# EAGLE board extruder-controller (EAGLE 5.06)
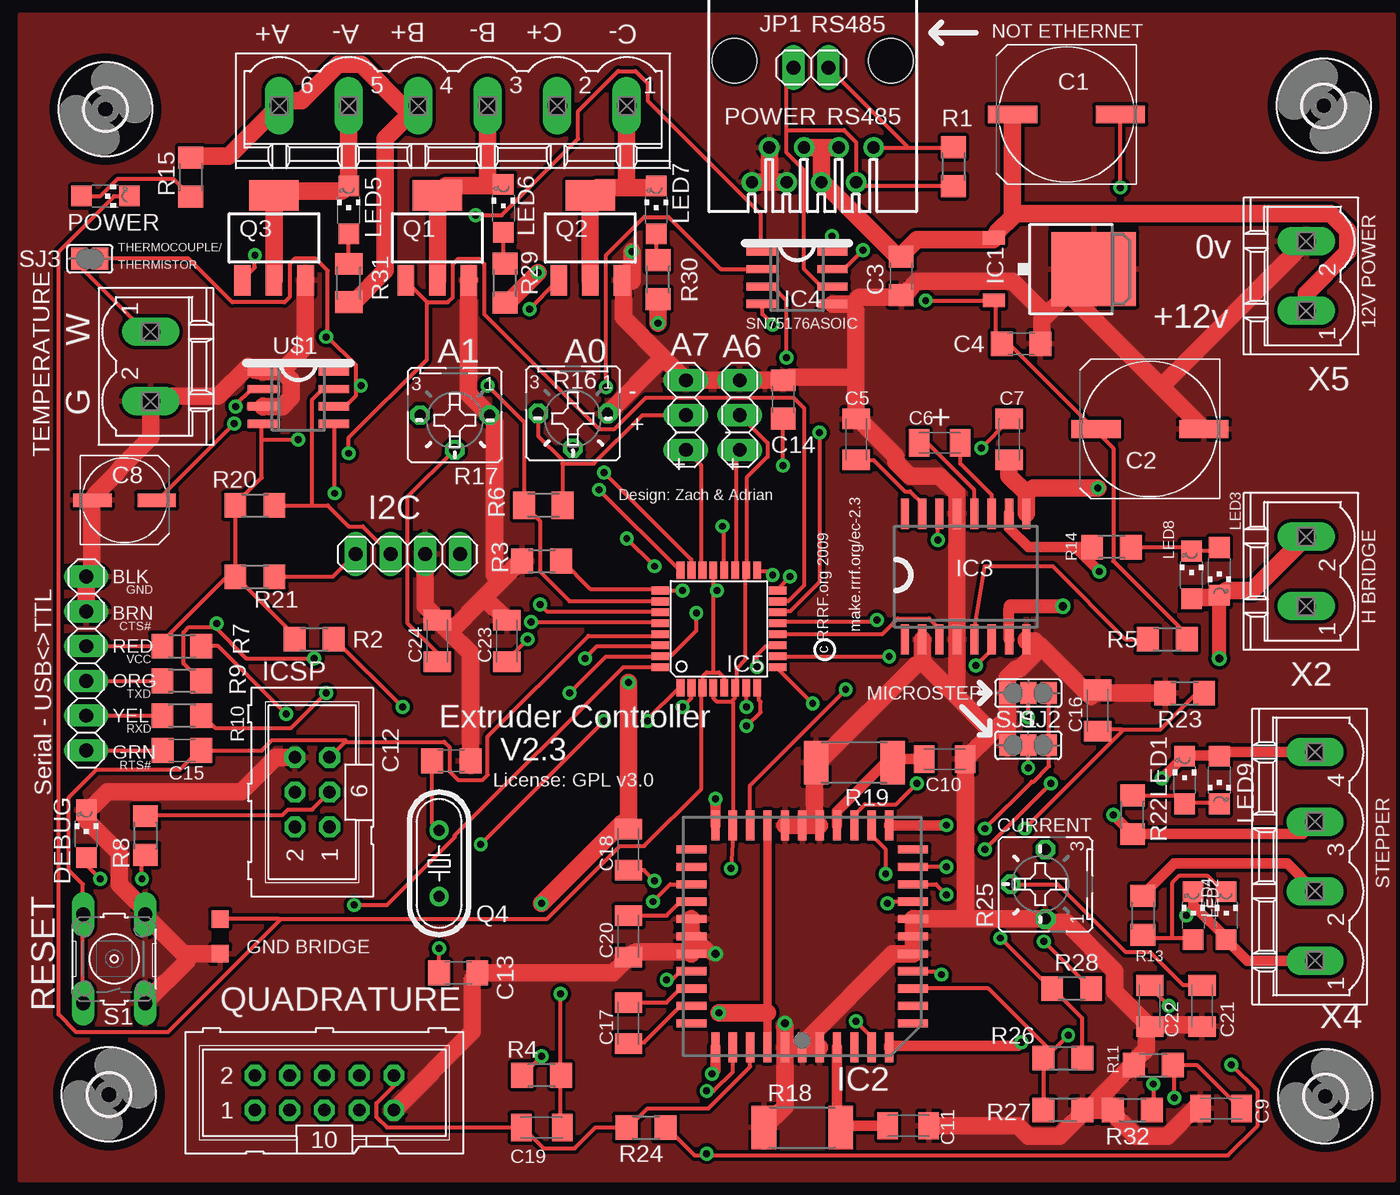
[diagram p0: board, top side]
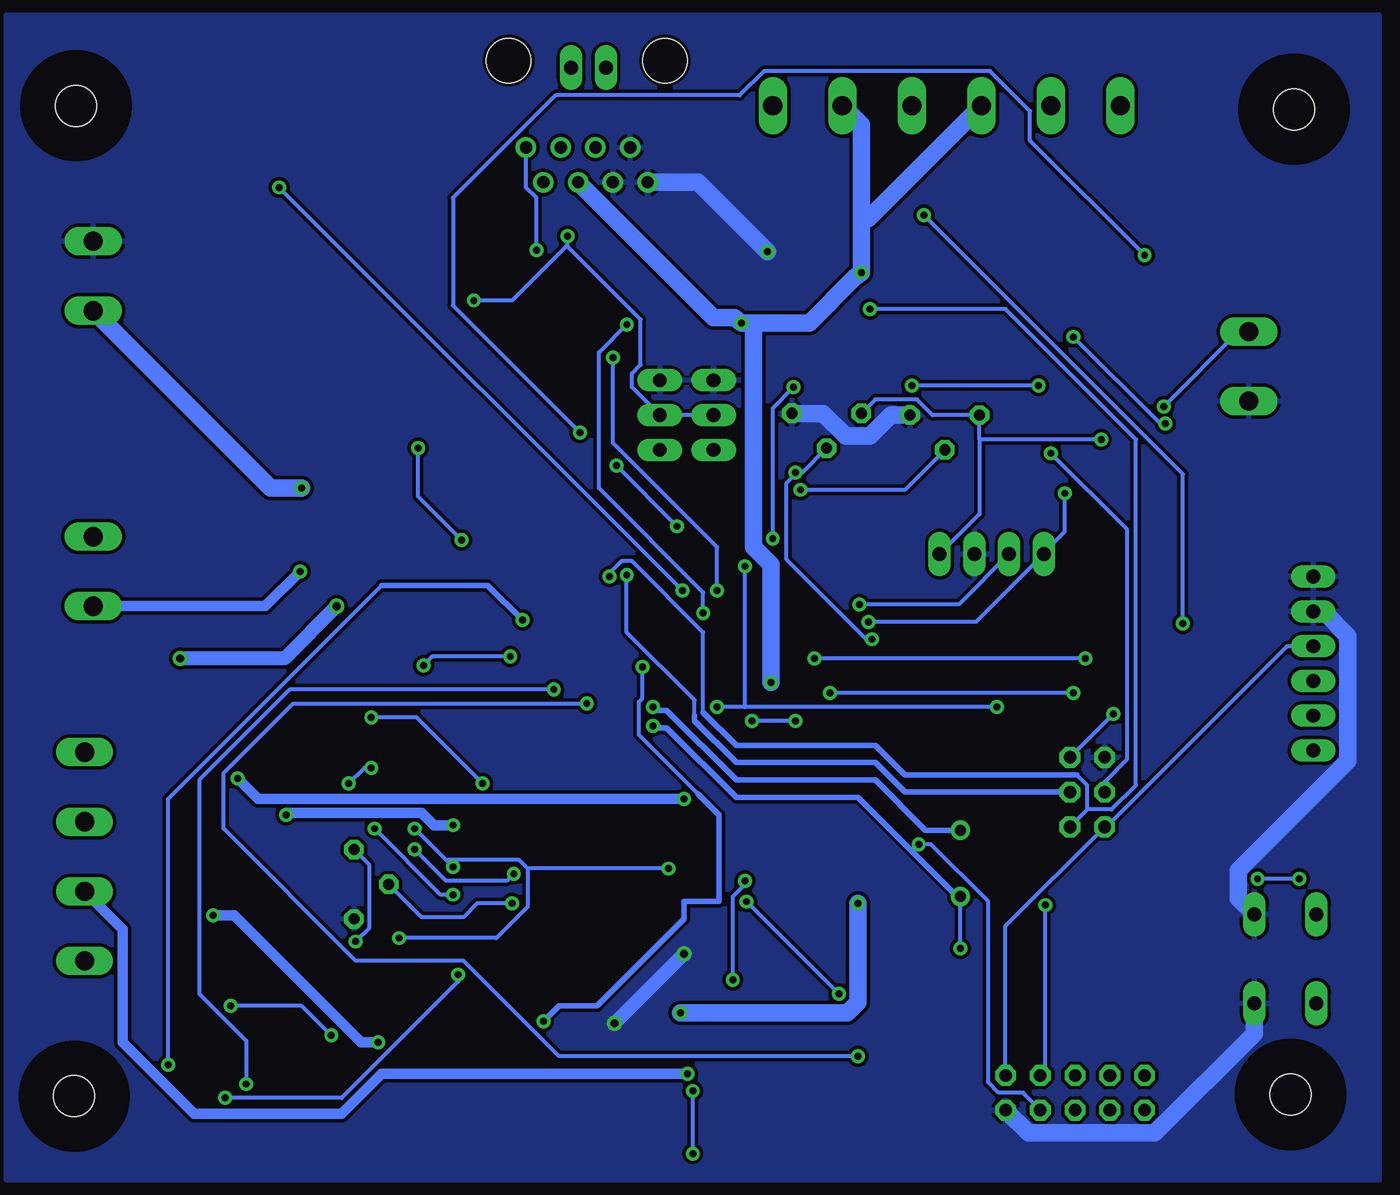
[diagram p1: board, bottom side, seen from below]

No outline drawn. Coordinates in mm, seen from the top.
Copper layers (1*16): Top 0.035mm / dielectric 1.5mm / Bottom 0.035mm
Design rules "reprap": minimum track width 8mil, minimum drill 20mil, track to track 10mil, track to pad 10mil, pad to pad 10mil, via to via 10mil, smd to smd 8mil, copper to edge 10mil, drill to drill 8mil, minimum pad ring 12mil, minimum via ring 10mil, stop-mask expansion 4mil, vias tented up to drill 25mil, thermal gap 10mil
Net classes: 0 default: width 0.305 mm; 1 power: width 1.27 mm; 2 motors: width 0.762 mm

## Footprints (pad centres in the part's own frame; a part is rotated, then mirrored left to right if it is on the bottom)
UD-10X10_NICHICON = smd 3.6 x 1.3: + 3.925,0; - -3.95,0
C1206 = smd 1.6 x 1.8: 1 -1.4,0; 2 1.4,0
C1206K = smd 1.5 x 2: 1 -1.5,0; 2 1.5,0
UD-6,3X5,8_NICHICON = smd 2.8 x 1: + 2.35,0; - -2.35,0
CHIPLED_1206 = smd 1.5 x 1.5: A 0,-1.75; C 0,1.75
3,0 = hole 3: 0,0
TO252 = smd 1 x 1.6: 1 -2.28,-4.8; 2 2.28,-4.8 | smd 5.4 x 6.2: 3 0,2.5
PLCC44 = smd 0.6 x 2.2: 1 0,8.1; 2 -1.27,8.1; 3 -2.54,8.1; 4 -3.81,8.1; 5 -5.08,8.1; 6 -6.35,8.1; 18 -6.35,-8.1; 19 -5.08,-8.1; 20 -3.81,-8.1; 21 -2.54,-8.1; 22 -1.27,-8.1; 23 0,-8.1; 24 1.27,-8.1; 25 2.54,-8.1; 26 3.81,-8.1; 27 5.08,-8.1; 28 6.35,-8.1; 40 6.35,8.1; 41 5.08,8.1; 42 3.81,8.1; 43 2.54,8.1; 44 1.27,8.1 | smd 2.2 x 0.6: 7 -8.1,6.35; 8 -8.1,5.08; 9 -8.1,3.81; 10 -8.1,2.54; 11 -8.1,1.27; 12 -8.1,0; 13 -8.1,-1.27; 14 -8.1,-2.54; 15 -8.1,-3.81; 16 -8.1,-5.08; 17 -8.1,-6.35; 29 8.1,-6.35; 30 8.1,-5.08; 31 8.1,-3.81; 32 8.1,-2.54; 33 8.1,-1.27; 34 8.1,0; 35 8.1,1.27; 36 8.1,2.54; 37 8.1,3.81; 38 8.1,5.08; 39 8.1,6.35
SO16W = smd 0.6 x 2.2: 1 -4.445,-4.6; 2 -3.175,-4.6; 3 -1.905,-4.6; 4 -0.635,-4.6; 5 0.635,-4.6; 6 1.905,-4.6; 7 3.175,-4.6; 8 4.445,-4.6; 9 4.445,4.6; 10 3.175,4.6; 11 1.905,4.6; 12 0.635,4.6; 13 -0.635,4.6; 14 -1.905,4.6; 15 -3.175,4.6; 16 -4.445,4.6
SO08 = smd 0.6 x 2.2: 1 -1.905,-2.6; 2 -0.635,-2.6; 3 0.635,-2.6; 4 1.905,-2.6; 5 1.905,2.6; 6 0.635,2.6; 7 -0.635,2.6; 8 -1.905,2.6
TQFP32-08 = smd 1.27 x 0.559: 1 -4.293,2.8; 2 -4.293,2; 3 -4.293,1.2; 4 -4.293,0.4; 5 -4.293,-0.4; 6 -4.293,-1.2; 7 -4.293,-2; 8 -4.293,-2.8; 17 4.293,-2.8; 18 4.293,-2; 19 4.293,-1.2; 20 4.293,-0.4; 21 4.293,0.4; 22 4.293,1.2; 23 4.293,2; 24 4.293,2.8 | smd 0.559 x 1.27: 9 -2.8,-4.293; 10 -2,-4.293; 11 -1.2,-4.293; 12 -0.4,-4.293; 13 0.4,-4.293; 14 1.2,-4.293; 15 2,-4.293; 16 2.8,-4.293; 25 2.8,4.293; 26 2,4.293; 27 1.2,4.293; 28 0.4,4.293; 29 -0.4,4.293; 30 -1.2,4.293; 31 -2,4.293; 32 -2.8,4.293
520426-4 = drill 0.889 round: 1 -4.445,6.35; 2 -3.175,8.89; 3 -1.905,6.35; 4 -0.635,8.89; 5 0.635,6.35; 6 1.905,8.89; 7 3.175,6.35; 8 4.445,8.89 | hole 3.251: -5.715,0; 5.715,0
1X02 = drill 1.016 long: 1 -1.27,0; 2 1.27,0
1X04 = drill 1.016 long: 1 -3.81,0; 2 -1.27,0; 3 1.27,0; 4 3.81,0
1X06 = drill 1.016 long: 1 -6.35,0; 2 -3.81,0; 3 -1.27,0; 4 1.27,0; 5 3.81,0; 6 6.35,0
1X03 = drill 1.016 long: 1 -2.54,0; 2 0,0; 3 2.54,0
SOT223 = smd 1.219 x 2.235: 1 -2.311,-3.099; 2 0,-3.099; 3 2.311,-3.099 | smd 3.6 x 2.2: 4 0,3.099
HC49/S = drill 0.813 round: 1 -2.413,0; 2 2.413,0
R1206 = smd 1.6 x 1.803: 1 -1.422,0; 2 1.422,0
M1206 = smd 1.6 x 2: 1 -1.4,0; 2 1.4,0
B25P = drill 0.813 octagon: A -2.54,0; E 2.54,0; S 0,2.54
R2512 = smd 1.8 x 3.2: 1 -2.8,0; 2 2.8,0
B3F-10XX = drill 1.016 long: 1 -3.251,2.261; 2 3.251,2.261; 3 -3.251,-2.261; 4 3.251,-2.261
SJ_2 = smd 1.168 x 1.6: 1 -1.524,0; 2 0,0; 3 1.524,0
SJ = smd 1.168 x 1.6: 1 -0.762,0; 2 0.762,0
ML6 = drill 0.914 octagon: 1 -2.54,-1.27; 2 -2.54,1.27; 3 0,-1.27; 4 0,1.27; 5 2.54,-1.27; 6 2.54,1.27
ML10 = drill 0.914 octagon: 1 -5.08,-1.27; 2 -5.08,1.27; 3 -2.54,-1.27; 4 -2.54,1.27; 5 0,-1.27; 6 0,1.27; 7 2.54,-1.27; 8 2.54,1.27; 9 5.08,-1.27; 10 5.08,1.27
MSTBV6 = drill 1.397 long: 1 -12.7,0; 2 -7.62,0; 3 -2.54,0; 4 2.54,0; 5 7.62,0; 6 12.7,0
MSTBV2 = drill 1.397 long: 1 -2.54,0; 2 2.54,0
MSTBV4 = drill 1.397 long: 1 -7.62,0; 2 -2.54,0; 3 2.54,0; 4 7.62,0
GND-GNDA = smd 1.27 x 1.27: GND -1.27,0; GNDA 1.27,0

## Placement (x,y rotation side)
C1  100uF  [UD-10X10_NICHICON]  75.18,76.58 180 top
C2  100uF  [UD-10X10_NICHICON]  81.28,53.59 180 top
C3  100nF  [C1206]  63.12,64.77 270 top
C4  100nF  [C1206]  71.88,59.82 0 top
C5  .22uF  [C1206K]  59.82,52.83 270 top
C6  100nF  [C1206K]  65.91,52.58 180 top
C7  100nF  [C1206K]  70.99,52.83 270 top
C8  10uF  [UD-6,3X5,8_NICHICON]  6.35,48.39 0 top
C9  1nF  [C1206K]  86.49,3.94 180 top
C10  100nF  [C1206K]  66.29,29.46 0 top
C11  100nF  [C1206K]  63.63,2.67 180 top
C12  16pf  [C1206]  30.23,29.34 180 top
C13  16pf  [C1206]  30.73,13.84 180 top
C14  100nF  [C1206]  54.48,55.75 270 top
C15  100nF  [C1206]  10.54,30.1 180 top
C16  1nF  [C1206K]  77.47,33.02 90 top
C17  220nF  [C1206K]  43.18,10.16 90 top
C18  220nF  [C1206K]  43.18,22.86 90 top
C19  1nF  [C1206K]  36.83,2.54 180 top
C20  220nF  [C1206K]  43.18,16.51 90 top
C21  100nF  [C1206K]  85.09,11.43 270 top
C22  100nF  [C1206K]  81.28,11.43 270 top
C23  100nF  [C1206K]  34.29,38.1 90 top
C24  100nF  [C1206K]  29.21,38.1 90 top
DEBUG  [CHIPLED_1206]  3.56,24 0 top
H1  MOUNT-HOLE3.0  [3,0]  5.21,4.95 0 top
H2  MOUNT-HOLE3.0  [3,0]  4.95,76.96 0 top
H3  MOUNT-HOLE3.0  [3,0]  94.11,4.83 0 top
H4  MOUNT-HOLE3.0  [3,0]  93.98,77.22 90 top
IC1  7805DT  [TO252]  74.68,65.28 270 top
IC2  A3977  [PLCC44]  55.88,16.51 180 top
IC3  A3949  [SO16W]  67.82,42.8 0 top
IC4  SN75176ASOIC  [SO08]  55.5,64.64 270 top
IC5  ATMEGA168  [TQFP32-08]  49.78,38.99 90 top
J1  [520426-4]  56.64,80.52 180 top
JP1  [1X02]  56.52,80.01 0 top
JP4  [1X04]  27.05,44.45 180 top
JP5  [1X06]  3.56,36.45 270 top
JP6  [1X03]  51.31,54.61 270 top
JP7  [1X03]  47.37,54.61 270 top
LED1  1  [CHIPLED_1206]  83.82,27.94 0 top
LED2  1  [CHIPLED_1206]  84.45,18.03 0 top
LED3  [CHIPLED_1206]  86.36,43.18 180 top
LED4  [CHIPLED_1206]  86.87,18.03 0 top
LED5  [CHIPLED_1206]  22.73,69.6 0 top
LED6  [CHIPLED_1206]  34.04,69.72 0 top
LED7  [CHIPLED_1206]  45.21,69.6 0 top
LED8  [CHIPLED_1206]  84.33,42.93 0 top
LED9  [CHIPLED_1206]  86.36,27.94 180 top
POWER  [CHIPLED_1206]  4.95,70.61 270 top
Q1  NIF5002  [SOT223]  29.21,67.56 0 top
Q2  NIF5002  [SOT223]  40.39,67.56 0 top
Q3  NIF5002  [SOT223]  17.27,67.56 0 top
Q4  16MHZ  [HC49/S]  29.34,21.84 90 top
R1  180  [R1206]  66.93,72.77 90 top
R2  4.7k  [R1206]  20.19,38.23 180 top
R3  4.7k  [R1206]  36.83,43.94 180 top
R4  1K  [R1206]  36.83,6.35 0 top
R5  10K  [R1206]  82.55,38.23 180 top
R6  4.7K  [M1206]  36.96,48.01 0 top
R7  10K  [R1206]  10.54,37.72 180 top
R8  1K  [R1206]  7.87,23.88 90 top
R9  1K  [R1206]  10.54,35.18 0 top
R10  1K  [R1206]  10.54,32.64 0 top
R11  33K  [R1206]  81.53,7.11 180 top
R13  1K  [R1206]  80.77,18.03 90 top
R14  1K  [R1206]  78.49,44.96 0 top
R15  1K  [R1206]  11.18,72.01 90 top
R16  10K  [B25P]  39.12,54.74 180 top
R17  10K  [B25P]  30.48,54.61 180 top
R18  0.25  [R2512]  55.88,2.54 0 top
R19  0.25  [R2512]  59.69,29.21 180 top
R20  4.7K  [R1206]  15.88,48.01 180 top
R21  4.7K  [R1206]  15.88,42.8 180 top
R22  1K  [R1206]  80.01,25.4 270 top
R23  33K  [R1206]  83.82,34.29 180 top
R24  1K  [R1206]  44.45,2.54 180 top
R25  10K  [B25P]  73.66,20.32 90 top
R26  10K  [R1206]  74.93,7.62 180 top
R27  1K  [R1206]  74.93,3.81 0 top
R28  2K2  [R1206]  75.56,12.7 0 top
R29  1K  [R1206]  34.16,64.26 270 top
R30  1K  [R1206]  45.34,64.52 270 top
R31  1K  [M1206]  22.73,64.26 270 top
R32  1K  [R1206]  80.01,3.81 180 top
S1  [B3F-10XX]  5.59,14.86 90 top
SJ1  [SJ_2]  72.39,30.48 0 top
SJ2  [SJ_2]  72.39,34.29 180 top
SJ3  [SJ]  3.81,66.04 0 top
SV1  [ML6]  20.07,27.05 90 top
SV2  [ML10]  20.95,5.08 0 top
U$1  MAX6675  [SO08]  19.05,55.88 270 top
X1  MSTBV6  [MSTBV6]  30.35,77.22 180 top
X2  MSTBV2  [MSTBV2]  92.71,43.18 90 top
X3  MSTBV2  [MSTBV2]  8.26,58.17 270 top
X4  MSTBV4  [MSTBV4]  93.34,22.35 90 top
X5  MSTBV2  [MSTBV2]  92.71,64.77 90 top
~NUDEV~1  GND-GNDA  [GND-GNDA]  13.34,16.51 90 top

## Library data of the parts
C1-C11 C14 C16-C24 R4 R6 R11 R13 R14 R18-R24 R26-R32 = rcl
C12 C13 C15 R1-R3 R5 R7-R10 R15 = resistor
DEBUG LED1-LED9 POWER = led
H1-H4 = holes
IC1 = linear
IC2 = allegro
IC3 IC4 U$1 = reprap
IC5 = SparkFun
J1 = con-amp
JP1 JP4-JP7 = pinhead
Q1-Q3 = transistor-power
Q4 = crystal
R16 R17 R25 = pot
S1 = switch-omron
SJ1-SJ3 = jumper
SV1 SV2 = con-harting-ml
X1-X5 = con-phoenix-508
~NUDEV~1 = supply1

## Nets
+12V [power]: C1.+ C3.1 C7.2 C18.2 IC1.1 IC2.25 IC2.43 IC3.9 J1.3 J1.4 J1.5 R15.2 R29.2 R30.2 R31.2 X1.2 X1.4 X1.6 X5.1
A0: C23.1 IC5.23 R16.S
A1: C24.1 IC5.24 R17.S
A2: IC4.3 IC5.25 R3.1
A3: C8.+ IC5.26 R6.1 SJ3.2 U$1.6
A6: IC5.19 JP6.3
A7: IC5.22 JP7.3
D2: IC5.32 SV2.8
D3: IC5.1 SV2.7
D4: IC4.2 IC5.2 R2.1
D5: IC5.9 R4.1
D6: IC3.6 IC5.10
D7: IC2.5 IC5.11
D8: IC3.3 IC5.12
D9: IC2.41 IC5.13 R24.1
D10: IC5.14 Q3.1
D11: IC5.15 Q1.1 SV1.4
D12: IC5.16 Q2.1 SV1.1
D13: IC5.17 R8.2 SV1.3
GND [power]: C2.- C3.2 C4.2 C5.1 C8.- C9.2 C10.2 C11.1 C12.1 C13.1 C14.1 C16.2 C20.1 C21.2 C22.2 C23.2 C24.2 DEBUG.C IC1.3 IC2.1 IC2.2 IC2.11 IC2.12 IC2.13 IC2.22 IC2.23 IC2.24 IC2.33 IC2.34 IC2.35 IC2.44 IC3.2 IC3.4 IC3.8 IC3.13 IC4.5 J1.6 J1.7 J1.8 JP4.2 JP5.1 JP5.2 JP6.1 JP7.1 Q1.3 Q2.3 Q3.3 R3.2 R11.2 R16.A R17.A R18.1 R19.2 R23.2 R25.A R27.2 R32.2 S1.3 S1.4 SJ1.1 SJ2.3 SV1.6 SV2.9 U$1.1 U$1.3 X3.2 X5.2 ~NUDEV~1.GND
GNDA: C1.- IC5.3 IC5.5 IC5.21 POWER.C ~NUDEV~1.GNDA
N$1: IC4.7 J1.1 JP1.2 R1.2
N$2: IC4.6 J1.2 JP1.1 R1.1
N$3 [motors]: IC2.6 LED2.C LED4.A X4.1
N$4 [motors]: IC2.40 R13.2 X4.2
N$5: C19.1 IC2.31 R4.2
N$6 [power]: IC3.7 LED3.C LED8.A X2.2
N$7: LED2.A LED4.C R13.1
N$8: DEBUG.A R8.1
N$9: C9.1 IC2.10 R11.1
N$11: C5.2 IC3.15
N$12: C16.1 IC2.15 R23.1
N$13: C6.2 IC3.12
N$14: C6.1 IC3.11
N$15: C7.1 IC3.14
N$16: IC3.5 R5.2
N$17 [motors]: IC3.10 R14.1 X2.1
N$18 [motors]: C11.2 IC2.3 R18.2
N$20: C14.2 IC5.20
N$21: JP5.5 R10.1
N$22: JP5.4 R9.1
N$23: LED1.A LED9.C R22.1
N$24: LED3.A LED8.C R14.2
N$25: POWER.A R15.1
N$26 [motors]: IC2.28 LED1.C LED9.A X4.4
N$27 [motors]: IC2.18 R22.2 X4.3
N$28: IC2.26 R32.1
N$30 [motors]: C10.1 IC2.21 R19.1
N$31: C12.2 IC5.7 Q4.2
N$32: C13.2 IC5.8 Q4.1
N$33 [power]: LED7.C Q2.2 Q2.4 X1.1
N$34 [power]: LED6.C Q1.2 Q1.4 X1.3
N$35 [power]: LED5.C Q3.2 Q3.4 X1.5
N$36: C18.1 IC2.36
N$37: C20.2 IC2.32
N$38: C17.2 IC2.37
N$39: C17.1 IC2.38
N$41: LED5.A R31.1
N$42: LED6.A R29.1
N$43: LED7.A R30.1
N$45: C22.1 IC2.9 R26.2 R27.1
N$46: IC2.19 SJ1.2
N$47: IC2.20 SJ2.2
N$48: R25.E R28.2
N$49: C21.1 IC2.14 R25.S
RESET: C15.1 IC5.29 R7.1 S1.1 S1.2 SV1.5
RTS#: C15.2 JP5.6
RX: IC4.1 IC5.30 R9.2
SCL: IC5.28 JP4.4 R21.1 U$1.5
SDA: IC5.27 JP4.3 R20.1 U$1.7
TCPL: SJ3.1 U$1.2 X3.1
TX: IC4.4 IC5.31 R10.2
VCC: C2.+ C4.1 C19.2 IC1.2 IC2.16 IC2.27 IC2.42 IC4.8 IC5.4 IC5.6 IC5.18 JP4.1 JP5.3 JP6.2 JP7.2 R2.2 R5.1 R6.2 R7.2 R16.E R17.E R20.2 R21.2 R24.2 R26.1 R28.1 SJ1.3 SJ2.1 SV1.2 SV2.10 U$1.4

## Tracks (layer width: path | path; a pad name or v marks a point on that pad's centre or on a via)
+12V  (via drill 0.51)
  Top 0.61: IC2.43 53.34,10.92 IC2.25
  Top 1.27: 72.26,48.9 70.99,50.16 C7.2 | 72.26,48.9 IC3.9 | v77.47,49.28 72.77,49.28 72.26,48.9 | R15.2 11.18,73.53 13.97,73.53 X1.6 18.16,77.6 19.3,77.6 21.97,80.26 23.62,80.26 26.8,77.09 X1.4 25.4,74.8 25.4,65.15 23.11,62.87 R31.2 | 57.28,74.17 J1.3 | 57.28,74.17 J1.5 | 57.28,74.17 J1.4 57.78,71.25 62.61,66.42 C3.1 63.12,66.29 64.26,67.44 69.85,67.44 IC1.1 70.23,68.07 71.25,69.09 71.25,69.34 | 71.25,69.34 71.25,76.58 C1.+ | v36.58,65.02 34.42,62.87 34.16,62.87 R29.2 | v45.34,61.34 R30.2 | v43.18,35.05 C18.2 42.67,24.77 v36.83,18.92 | X5.1 92.71,63.5 95.76,66.55 95.76,68.07 94.49,69.34 71.25,69.34 | v49.78,10.92 53.34,10.92
  Bottom 1.27: v77.47,49.28 79.76,49.28 X5.1 | 36.58,68.96 36.58,75.82 X1.2 | 36.58,68.96 v36.58,65.02 37.08,64.64 40.39,61.34 44.45,61.34 | 44.45,61.34 v45.34,61.34 45.85,61.72 47.37,61.72 J1.4 | v43.18,35.05 43.18,43.69 44.45,44.96 44.45,61.34 | X1.4 36.07,68.96 36.58,68.96 | v49.78,10.92 37.59,10.92 36.83,11.68 v36.83,18.92
A0  (via drill 0.51)
  Top 0.305: v41.4,50.42 47.75,44.07 47.75,43.31 IC5.23 | v35.81,38.23 34.29,36.7 C23.1
  Bottom 0.305: R16.S 40.89,50.42 v41.4,50.42 41.4,50.29 42.04,49.66 42.04,44.07 36.2,38.23 v35.81,38.23
A1  (via drill 0.51)
  Top 0.305: v41.02,49.15 46.86,43.31 IC5.24 | R17.S 27.05,48.64 27.05,39.37 29.21,37.21 C24.1
  Bottom 0.305: v41.02,49.15 33.4,49.15 R17.S
A2  (via drill 0.51)
  Top 0.305: R3.1 38.35,43.94 40.39,41.91 45.47,41.91 IC5.25 45.59,41.78 v47.12,41.78 | v54.74,58.8 54.74,62.99 53.72,64.01 IC4.3
  Bottom 0.305: v54.74,58.8 54.74,52.58 47.12,44.96 v47.12,41.78
A3  (via drill 0.51)
  Top 0.305: IC5.26 45.47,41.02 38.86,41.02 36.7,43.18 36.7,46.86 R6.1 35.56,48.13 35.56,54.1 v32.89,56.77 | SJ3.2 11.05,66.04 14.22,62.87 18.03,62.87 18.41,63.25 18.41,65.66 18.8,66.04 20.32,66.04 21.21,65.15 21.21,60.33 | 21.21,60.33 23.24,58.29 23.24,56.77 | 23.24,56.77 23.24,56.01 22.48,55.24 U$1.6 | v14.35,53.98 8.76,48.39 C8.+ | v21.08,60.33 21.21,60.33 | 23.24,56.77 v23.62,56.77
  Bottom 0.305: v14.35,53.98 14.73,53.98 v21.08,60.33 | v23.62,56.77 v32.89,56.77
A6
  Top 0.305: JP6.3 51.05,51.82 51.05,43.31 IC5.19
A7
  Top 0.305: JP7.3 48.51,50.93 48.51,43.31 IC5.22
D2  (via drill 0.51)
  Top 0.305: v23.11,18.8 25.53,18.8 30.48,23.75 30.48,23.88 42.8,36.2 45.47,36.2 IC5.32
  Bottom 0.305: v23.11,18.8 23.11,6.73 SV2.8
D3  (via drill 0.51)
  Top 0.305: v44.58,32.26 44.58,32.38 46.86,34.67 IC5.1 | v32.38,23.24 v41.4,32.26
  Bottom 0.305: v41.4,32.26 v44.58,32.26 | v32.38,23.24 31.5,23.24 27.3,19.05 27.3,5.84 26.54,5.08 24.77,5.08 SV2.7
D4  (via drill 0.51)
  Top 0.305: v47.12,33.27 47.75,33.91 47.75,34.67 IC5.2 | v26.67,33.27 21.72,38.23 R2.1 | v41.53,56.64 41.53,66.29 44.32,69.09 46.1,69.09 49.91,65.28 IC4.2 | v45.09,43.56 v43.05,45.59
  Bottom 0.305: v26.67,33.27 45.09,33.27 | 45.09,33.27 v47.12,33.27 | v41.53,56.64 43.05,55.12 v43.05,45.59 | 45.09,33.27 v45.09,43.56
D5  (via drill 0.51)
  Top 0.305: v56.64,33.53 54.1,36.07 IC5.9 | v36.83,7.75 35.43,6.35 R4.1
  Bottom 0.305: v56.64,33.53 78.11,33.53 83.19,28.45 83.19,24.38 73.53,14.73 65.66,14.73 58.67,7.75 v36.83,7.75
D6  (via drill 0.51)
  Top 0.305: v62.23,36.96 54.1,36.96 IC5.10 | v68.58,36.32 69.72,37.47 IC3.6
  Bottom 0.305: v62.23,36.96 67.94,36.96 v68.58,36.32
D7  (via drill 0.51)
  Top 0.305: v52.58,36.2 52.58,37.08 53.21,37.72 53.98,37.72 IC5.11 | v59.82,10.29 60.96,9.14 IC2.5
  Bottom 0.305: v52.58,36.2 52.58,33.91 52.83,33.66 52.83,31.24 48.51,26.92
  Bottom 0.406: v59.82,10.29 58.67,11.43 55.88,11.43 49.53,17.78 49.53,19.05 46.99,19.05 46.99,25.4 48.51,26.92
D8
  Top 0.305: IC5.12 54.1,38.61 61.72,38.61 62.87,39.75 65.15,39.75 65.91,38.99 IC3.3
D9  (via drill 0.51)
  Top 0.305: v61.34,39.62 61.21,39.5 54.1,39.5 IC5.13 | v87.25,7.11 89.15,5.21 89.15,2.67 87,0.51 48.9,0.51 | 48.9,0.51 48.01,0.51 45.97,2.54 R24.1 | v48.9,5.21 49.4,5.21 50.8,6.6 IC2.41 | 48.9,0.51 v48.9,0.64
  Bottom 0.305: 71.63,42.16 87.25,26.54 v87.25,7.11 | v48.9,0.64 v48.9,5.21
  Bottom 0.406: 71.63,42.16 63.88,42.16 v61.34,39.62
D10  (via drill 0.51)
  Top 0.305: v57.15,53.34 57.15,42.42 54.99,40.26 54.1,40.26 IC5.14 | v15.88,66.29 15.88,65.41 14.99,64.52 Q3.1
  Bottom 0.305: v57.15,53.34 66.42,62.61 66.42,70.48 58.93,77.98 45.47,77.98 43.69,79.76 27.18,79.76 24.26,76.83 24.26,74.68 v15.88,66.29
D11  (via drill 0.51)
  Top 0.305: 28.45,62.87 29.97,62.87 30.35,63.25 30.35,65.66 30.73,66.04 32.26,66.04 32.64,65.66 32.64,61.98 41.02,53.59 42.16,53.59 44.45,55.88 55.24,55.88 56.01,55.12 56.01,42.16 54.86,41.02 54.1,41.02 IC5.15 | 28.45,62.87 26.92,64.39 Q1.1 | v22.73,51.82 22.73,52.96 28.45,58.67 28.45,62.87
  Bottom 0.305: SV1.4 18.8,27.81 17.14,29.46 17.14,46.23 v22.73,51.82
D12  (via drill 0.51)
  Top 0.305: v54.99,42.8 54.1,41.91 IC5.16 | v35.94,62.36 37.97,64.39 Q2.1
  Bottom 0.305: v54.99,42.8 54.99,43.05 54.1,43.94 53.34,43.94 48.13,38.73 48.13,32.89 | 20.83,28.32 20.07,27.56 20.07,25.78 | 20.07,25.78 SV1.1 | v35.94,62.36 26.04,62.36 16.51,52.83 16.51,27.56 18.29,25.78 20.07,25.78
  Bottom 0.406: 20.83,28.32 33.4,28.32 35.56,30.48 45.72,30.48 48.13,32.89
D13  (via drill 0.51)
  Top 0.305: v53.72,42.93 53.47,43.18 52.7,43.18 IC5.17 | SV1.3 20.07,25.78 18.29,25.78 17.91,25.4 7.87,25.4 R8.2
  Bottom 0.305: v53.72,42.93 53.72,38.73 48.77,33.78 48.77,32.64
  Bottom 0.406: 48.77,32.64 48.77,32.26 45.72,29.21 35.56,29.21 33.4,27.05 SV1.3
GND  (via drill 0.51, 0.6)
  Top 0.406: v54.61,10.16 54.61,9.91 | 49.28,15.24 v49.53,15.24
  Top 1.016: 48.26,16.26 49.28,15.24
  Top 1.27: Q1.3 31.5,64.39 31.5,56.13 R17.A 33.4,54.1 33.4,42.93 33.85,42.48 | 30.1,38.73 29.21,39.62 C24.2 28.83,40.13 28.32,40.64 JP4.2 | 30.1,38.73 31.62,37.21 C12.1 | 33.85,42.48 32.64,41.27 | 33.85,42.48 35.31,43.94 R3.2 | 32.64,41.27 30.1,38.73 | C23.2 34.29,39.62 32.64,41.27 | 73.72,61.91 77.09,65.28 IC1.3 75.69,63.12 82.11,56.71 | 73.72,61.91 73.41,61.59 73.41,59.82 C4.2 | 82.11,56.71 85.22,53.59 C2.- | 82.11,56.71 X5.2 | 59.56,62.74 60.07,63.25 63.12,63.25 C3.2 63.63,63.75 64.26,64.39 71.25,64.39 73.72,61.91 | 59.56,62.74 IC4.5 | 59.82,57.4 59.82,62.23 59.56,62.74 | 59.82,57.4 C5.1 60.33,53.98 62.74,51.56 62.74,51.18 63.75,50.16 65.91,50.16 67.18,48.9 IC3.13 IC3.4 67.18,34.92 66.74,34.48 | 53.47,71.63 J1.6 | J1.8 53.47,71.63 | 53.47,71.63 J1.7 | 42.8,64.39 42.8,61.72 45.72,58.8 | 45.72,58.8 JP7.1 JP6.1 C14.1 54.99,57.4 59.82,57.4 | 42.8,64.39 Q2.3 | 45.72,58.8 R16.A | v43.43,66.55 43.43,64.39 42.8,64.39 | C22.2 81.28,10.03 85.09,10.03 C21.2 | 77.22,3.81 R27.2 76.07,3.3 74.68,1.91 72.39,1.91 71.63,2.67 C11.1 | 77.22,3.81 R32.2 78.87,3.3 80.26,1.91 82.55,1.91 84.58,3.94 C9.2 | 77.22,3.81 77.22,4.32 80.01,7.11 R11.2 80.39,7.62 81.03,8.26 81.03,9.4 C22.2 | R23.2 77.6,34.29 77.47,34.42 C16.2 76.96,34.04 73.34,37.66 | 73.34,37.66 72.9,38.1 72.26,38.1 IC3.8 | 64.01,16.51 64.01,15.24 IC2.11 62.48,15.24 56.13,8.89 IC2.1 55.88,8.38 | 64.01,16.51 IC2.12 | 64.01,16.51 64.01,17.78 IC2.13 67.82,17.78 | 67.82,17.78 R25.A 74.17,17.53 75.18,17.53 78.74,13.97 78.74,12.45 80.77,10.41 C22.2 | 55.88,24.64 54.61,24.64 IC2.24 | 55.88,24.64 IC2.23 | 56.77,24.64 57.15,24.64 IC2.22 | 56.77,24.64 55.88,24.64 | 56.77,24.64 56.77,29.21 R19.2 57.4,29.59 64.14,36.32 64.64,36.58
  Top 1.27: 70.87,32 SJ2.3 70.87,35.43 71.5,36.07 71.75,36.07 73.34,37.66 | 70.87,32 SJ1.1 | 69.79,31.43 70.36,32 70.87,32 | 69.79,31.43 67.82,29.46 C10.2 67.82,28.96 67.82,17.78 | 66.74,34.48 64.64,36.58 | 64.64,36.58 IC3.2 | 69.79,31.43 66.74,34.48 | 17.91,57.78 18.54,57.15 18.54,55.88 17.91,55.24 U$1.3 | 17.91,57.78 U$1.1 15.88,57.91 15.37,58.17 13.21,56.01 8.76,56.01 X3.2 8.26,52.96 6.1,50.8 5.71,50.29 4.32,48.9 3.94,48.39 | Q3.3 19.56,64.39 19.56,59.56 18.29,58.29 17.91,57.78 | 3.94,48.39 3.94,43.18 JP5.1 JP5.2 | 3.94,48.39 C8.- | 10.92,15.24 10.67,15.24 7.87,18.03 S1.4 7.62,18.67 5.97,20.32 5.97,22.61 3.56,25.02 DEBUG.C 4.06,26.04 5.08,27.05 14.86,27.05 17.4,29.59 SV1.6 | 10.92,15.24 ~NUDEV~1.GND | S1.3 7.87,11.68 10.92,14.73 10.92,15.24 | 55.88,8.38 54.61,8.38 IC2.44 | IC2.2 57.15,8.38 55.88,8.38 | IC2.44 54.61,4.06 R18.1 | 47.75,16.51 47.75,15.24 IC2.35 47.24,15.37 43.69,15.37 C20.1 43.18,14.99 42.04,13.84 C13.1 31.75,13.34 31.75,9.53 SV2.9 | 47.75,16.51 IC2.34 48.26,16.26 | IC2.33 47.75,17.78 47.75,16.51 | 54.61,9.91 IC2.44
  Bottom 1.016: v49.53,15.24 v54.61,10.16
  Bottom 1.27: J1.8 48.51,71.63 v43.43,66.55 | R17.A 34.42,54.61 35.94,53.09 37.72,53.09 39.37,54.74 R16.A | SV2.9 24.38,2.16 15.11,2.16 7.87,9.4 7.87,11.56 S1.3 | JP5.2 2.79,40.26 1.02,38.48 1.02,29.34 9.02,21.34 9.02,19.3 7.87,18.16 S1.4
  pour Top: 0,83.82 99.06,83.82 99.06,-1.27 0,-1.27 -1.27,-1.27 -1.27,83.82
  pour Bottom: -1.27,83.82 99.06,83.82 99.06,-1.27 -1.27,-1.27
GNDA  (via drill 0.51)
  Top 0.305: 17.65,17.78 37.21,17.78 42.55,23.11 44.32,23.11 48.51,27.3 48.51,34.67 IC5.3 48.64,34.8 48.64,35.56 48.9,35.81 49.4,35.81 | 17.65,17.78 ~NUDEV~1.GNDA | 49.4,35.81 49.78,35.81 50.16,35.43 50.16,34.8 IC5.5 | 49.4,41.78 49.4,43.18 IC5.21 | 49.4,35.81 49.4,41.78 | POWER.C 5.59,70.61 1.52,66.55 1.52,10.79 2.79,9.53 9.53,9.53 17.65,17.65 17.65,17.78 | v79.12,71.25 C1.- | 49.4,41.78 v49.66,41.78
  Bottom 0.305: v49.66,41.78 v79.12,71.25
N$1  (via drill 0.51)
  Top 0.305: J1.1 63.5,74.17 | 63.5,74.17 66.93,74.17 R1.2 | v60.33,66.67 58.93,65.28 IC4.7 | JP1.2 63.5,74.3 63.5,74.17
  Bottom 0.305: v60.33,66.67 60.33,70.48 61.09,71.25 J1.1
N$2
  Top 0.305: R1.1 66.93,71.37 60.07,71.37 J1.2 59.82,74.55 58.93,75.44 54.74,75.44 | 54.74,75.44 54.74,79.5 JP1.1 | 54.74,75.44 54.74,73.79 56.01,72.52 56.01,65.28 57.28,64.01 IC4.6
N$3  (via drill 0.51)
  Top 0.762: 84.58,18.67 86.87,16.38 LED4.A 87.12,16 88.39,14.73 X4.1 | 84.58,18.67 84.45,18.8 LED2.C | v71.88,8.76 71.63,8.51 62.23,8.51 IC2.6 | v83.95,18.03 84.58,18.67
  Bottom 0.762: v71.88,8.76 73.15,8.76 82.42,18.03 v83.95,18.03
N$4  (via drill 0.51)
  Top 0.762: X4.2 91.31,21.84 83.06,21.84 80.77,19.56 R13.2 | v49.28,6.48 49.53,6.73 IC2.40
  Bottom 0.762: v49.28,6.48 71.63,6.48 74.55,3.56 85.34,3.56 90.55,8.76 90.55,17.02 X4.2
N$5  (via drill 0.51)
  Top 0.305: C19.1 38.23,2.54 38.23,6.35 R4.2 38.23,6.48 v38.23,12.32 | v44.96,19.05 46.23,20.32 IC2.31
  Bottom 0.305: v38.23,12.32 v44.96,19.05
N$6  (via drill 0.6)
  Top 0.406: 70.99,40.51 71.12,40.64
  Top 0.813: IC3.7 70.99,40.51
  Top 1.016: 71.12,40.64 v74.93,40.64 | v86.36,36.83 LED3.C
  Top 1.27: LED8.A 84.33,41.27 86.23,41.27 86.36,41.4 LED3.C 86.87,41.78 88.77,41.78 X2.2
  Bottom 1.016: v74.93,40.64 78.74,36.83 v86.36,36.83
N$7
  Top 0.305: 82.93,16.38 80.9,16.38 80.77,16.51 R13.1 | 82.93,16.38 84.45,16.38 LED2.A | LED4.C 86.87,19.81 86.61,19.81 85.47,20.95 83.44,20.95 82.93,20.45 82.93,16.38
N$8  (via drill 0.51)
  Top 0.305: v4.57,20.7 3.56,21.72 DEBUG.A | v7.62,20.7 7.62,22.1 7.87,22.35 R8.1
  Bottom 0.305: v4.57,20.7 v7.62,20.7
N$9  (via drill 0.51)
  Top 0.305: C9.1 87.88,3.94 84.71,7.11 R11.1 83.06,6.99 v83.06,4.7 | v66.04,13.72 65.79,13.97 IC2.10
  Bottom 0.305: v66.04,13.72 66.04,13.21 74.55,4.7 v83.06,4.7
N$11
  Top 0.305: C5.2 59.82,51.31 61.09,51.31 63.37,49.02 63.75,49.02 64.64,48.13 IC3.15
N$12  (via drill 0.51)
  Top 0.305: 79.25,31.62 77.47,31.62 C16.1 | 79.25,31.62 82.04,31.62 84.71,34.29 R23.1 | v66.42,19.56 65.66,20.32 IC2.15 | v72.14,24.38 79.25,31.5 79.25,31.62
  Bottom 0.305: v66.42,19.56 67.31,19.56 v72.14,24.38
N$13
  Top 0.305: C6.2 65.02,52.58 68.45,49.15 IC3.12
N$14
  Top 0.305: C6.1 67.44,52.58 67.44,51.05 69.72,48.77 IC3.11
N$15  (via drill 0.51)
  Top 0.305: v68.96,52.2 70.99,54.23 C7.1 | v65.79,45.47 65.79,47.24 65.91,47.37 IC3.14
  Bottom 0.305: v68.96,52.2 68.96,48.64 v65.79,45.47
N$16
  Top 0.305: IC3.5 68.45,38.99 69.22,43.56 74.17,43.56 79.5,38.23 R5.2
N$17  (via drill 0.51)
  Top 0.762: 76.07,44.96 72.39,44.96 70.99,46.35 IC3.10 | 76.07,44.96 R14.1 | v77.6,43.18 76.07,44.7 76.07,44.96
  Bottom 0.762: X2.1 80.14,40.64 v77.6,43.18
N$18
  Top 0.762: C11.2 58.93,2.67 58.8,2.54 R18.2 58.42,2.79 IC2.3
N$20  (via drill 0.51)
  Top 0.305: v50.04,46.48 50.16,46.35 50.16,43.31 IC5.20 | v54.48,50.93 C14.2
  Bottom 0.305: v50.04,46.48 v54.48,50.93
N$21
  Top 0.305: JP5.5 R10.1
N$22
  Top 0.305: JP5.4 R9.1
N$23
  Top 0.305: LED9.C 86.36,26.29 83.82,26.29 LED1.A 83.69,26.29 83.19,26.8 80.01,26.8 R22.1
N$24
  Top 0.305: LED3.A 86.36,44.83 86.23,44.7 84.33,44.7 LED8.C 84.2,44.7 83.95,44.96 R14.2
N$25
  Top 0.305: POWER.A 4.57,70.61 5.84,71.88 9.91,71.88 11.18,70.61 R15.1
N$26  (via drill 0.51)
  Top 0.762: v82.17,28.07 83.57,29.46 LED1.C 83.82,29.72 86.36,29.72 LED9.A 86.61,29.97 X4.4 | IC2.28 v49.53,26.54
  Bottom 0.762: v49.53,26.54 80.64,26.54 v82.17,28.07
N$27  (via drill 0.51)
  Top 0.762: X4.3 92.46,24 80.01,24 R22.2 79.76,24.26 v78.61,25.4 | v66.42,24.64 62.23,24.64 IC2.18
  Bottom 0.762: v66.42,24.64 67.82,24.64 68.71,25.53 78.49,25.53 v78.61,25.4
N$28  (via drill 0.51)
  Top 0.305: v81.53,5.71 81.53,3.81 R32.1 | v59.05,34.54 52.07,27.56 IC2.26
  Bottom 0.305: v81.53,5.71 81.53,8.89 84.96,12.32 84.96,27.94 78.36,34.54 v59.05,34.54
N$30
  Top 0.762: C10.1 62.87,29.46 62.61,29.21 R19.1 62.23,29.46 58.42,25.65 IC2.21
N$31  (via drill 0.51)
  Top 0.305: v51.82,33.27 51.82,34.67 IC5.7 | Q4.2 28.83,24.77 C12.2
  Bottom 0.406: Q4.2 31.88,24.26 35.56,27.94 45.72,27.94 50.8,33.02 51.56,33.02 v51.82,33.27
N$32  (via drill 0.51)
  Top 0.305: v51.82,31.88 52.83,32.89 52.83,33.66 52.7,33.78 52.7,34.67 IC5.8 | v29.34,15.62 C13.2
  Bottom 0.305: v51.82,31.88 51.31,31.88 | v29.34,15.62 Q4.1
  Bottom 0.406: Q4.1 29.59,19.43 36.83,26.67 45.72,26.67 50.8,31.75 51.69,31.75 v51.82,31.88
N$33
  Top 1.27: 43.05,71.25 40.89,71.25 40.39,70.74 Q2.4 Q2.2 | 43.05,71.25 45.21,71.25 LED7.C | 43.05,71.25 X1.1
N$34
  Top 1.27: 32.89,71.37 29.84,71.37 29.21,70.74 Q1.4 Q1.2 | 32.89,71.37 34.04,71.37 LED6.C | 32.89,71.37 X1.3
N$35
  Top 1.27: Q3.2 Q3.4 17.78,70.99 22.23,70.99 LED5.C X1.5
N$36  (via drill 0.51)
  Top 0.305: v45.09,20.57 44.32,21.34 43.18,21.34 C18.1 | v45.97,13.34 46.35,13.34 46.99,13.97 IC2.36
  Bottom 0.305: v45.09,20.57 45.09,20.32 45.97,19.43 v45.97,13.34
N$37
  Top 0.305: C20.2 43.18,18.03 45.97,18.03 46.99,19.05 IC2.32
N$38
  Top 0.305: C17.2 43.18,11.68 45.97,11.68 46.99,12.7 IC2.37
N$39
  Top 0.305: C17.1 43.18,8.76 44.32,8.76 46.99,11.43 IC2.38
N$41
  Top 0.305: R31.1 LED5.A
N$42
  Top 0.305: LED6.A 34.04,65.91 34.16,65.79 R29.1
N$43
  Top 0.305: LED7.A 45.21,66.17 45.34,66.04 R30.1
N$45  (via drill 0.51)
  Top 0.305: R27.1 73.53,3.81 73.53,7.62 R26.2 | v82.68,11.43 81.28,12.83 C22.1 | v75.31,9.27 73.66,7.62 R26.2 | IC2.9 69.47,12.7 74.04,8.13 R26.2
  Bottom 0.305: v82.68,11.43 77.47,11.43 v75.31,9.27
N$46  (via drill 0.51)
  Top 0.305: v72.39,28.83 SJ1.2 | v69.22,22.86 v74.04,27.69 | v61.98,21.08 61.98,22.86 60.96,23.88 IC2.19
  Bottom 0.305: v72.39,28.83 72.9,28.83 v74.04,27.69 | v69.22,22.86 66.93,20.57 62.48,20.57 v61.98,21.08
N$47  (via drill 0.51)
  Top 0.305: v72.39,32.51 SJ2.2 | v64.26,27.69 62.74,26.16 60.45,26.16 59.69,25.4 IC2.20
  Bottom 0.305: v72.39,32.51 69.09,32.51 v64.26,27.69
N$48  (via drill 0.51)
  Top 0.305: v73.53,16.13 76.96,12.7 R28.2
  Bottom 0.305: v73.53,16.13 72.52,17.14 72.52,21.72 R25.E
N$49  (via drill 0.51)
  Top 0.305: R25.S 74.55,20.32 79.5,15.37 81.28,15.37 83.69,12.95 85.09,12.95 C21.1 | v62.1,18.92 62.23,19.05 IC2.14
  Bottom 0.305: v62.1,18.92 64.64,18.92 65.66,17.91 68.71,17.91 R25.S
RESET  (via drill 0.51)
  Top 0.305: S1.1 3.3,11.68 3.3,18.03 S1.2 3.3,18.16 3.3,20.32 2.29,21.34 2.29,26.67 4.32,28.7 10.41,28.7 11.81,30.1 C15.1 16.38,30.1 17.14,30.86 22.48,30.86 22.48,30.73 | 22.48,30.73 29.72,30.73 30.1,30.35 30.1,28.57 30.73,27.94 32.51,27.94 32.89,28.32 32.89,31.11 40.26,38.48 45.47,38.48 IC5.29 | 22.48,30.73 SV1.5 | v18.16,32.77 13.21,37.72 R7.1
  Bottom 0.305: SV1.5 v18.16,32.77
RTS#
  Top 0.305: JP5.6 C15.2
RX  (via drill 0.51)
  Top 0.305: v40.01,36.83 40.89,37.72 45.47,37.72 IC5.30 | v20.19,36.83 15.24,36.83 12.95,39.12 | 12.95,39.12 11.05,39.12 10.67,38.73 10.67,36.45 11.94,35.18 R9.2 | v32,69.22 33.91,69.22 39.5,74.8 39.5,76.83 42.42,79.76 43.69,79.76 44.58,78.87 44.58,77.6 52.83,69.34 52.83,66.55 IC4.1 | v13.08,39.37 12.95,39.24 12.95,39.12
  Bottom 0.305: v20.19,36.83 v40.01,36.83 | v32,69.22 13.08,50.29 v13.08,39.37
SCL  (via drill 0.51)
  Top 0.305: v36.07,39.5 45.47,39.5 IC5.28 | JP4.4 21.59,42.8 R21.1 | v21.72,48.9 21.72,53.98 U$1.5
  Bottom 0.305: v36.07,39.5 28.19,39.5 JP4.4 23.24,44.58 21.72,46.1 v21.72,48.9
SDA  (via drill 0.51)
  Top 0.305: v36.7,40.77 37.21,40.26 45.47,40.26 IC5.27 | 20.07,48.01 21.21,48.01 22.73,46.48 23.75,46.48 JP4.3 | R20.1 20.07,48.01 | U$1.7 20.83,56.52 20.07,55.75 20.07,48.01
  Bottom 0.305: v36.7,40.77 29.46,40.77 JP4.3
TCPL  (via drill 0.51)
  Top 0.305: SJ3.1 3.05,65.53 7.87,60.71 X3.1 | v14.48,55.24 14.48,55.37 15.62,56.52 U$1.2
  Bottom 0.305: v14.48,55.24 9.02,60.71 X3.1
TX  (via drill 0.51)
  Top 0.305: v38.86,34.29 41.53,36.96 45.47,36.96 IC5.31 45.59,37.08 46.35,37.08 48.13,38.86 v48.13,40.13 | v21.08,34.29 18.54,31.75 12.95,31.75 12.06,32.64 R10.2 | v53.72,61.21 52.96,61.98 52.96,62.74 IC4.4
  Bottom 0.305: v21.08,34.29 v38.86,34.29 | v53.72,61.21 55.75,59.18 55.75,49.28 48.13,41.66 v48.13,40.13
VCC  (via drill 0.51)
  Top 0.305: JP5.3 R7.2 9.14,37.85 9.14,38.1 14.35,43.31 R21.2 | R2.2 18.67,38.23 18.67,38.61 14.48,42.8 R21.2 | R21.2 14.48,42.93 14.48,48.01 R20.2 14.48,48.13 16.38,50.04 16.38,52.83 | 16.38,52.83 16.38,53.98 U$1.4 | IC2.42 52.07,6.99 49.02,3.94 44.58,3.94 43.18,2.54 R24.2 40.77,2.54 39.24,1.02 36.96,1.02 35.43,2.54 C19.2 25.53,2.54 24.77,3.3 24.77,4.32 26.04,5.59 SV2.10 | R26.1 76.33,7.62 76.33,10.54 74.17,12.7 R28.1 74.04,12.7 v70.36,16.38 | SJ2.1 SJ1.3 73.91,28.96 72.77,27.81 72.64,27.81 v69.22,24.38 | v66.42,21.59 IC2.16 | 50.67,33.66 49.66,33.66 49.4,33.91 49.4,34.67 IC5.4 | 50.67,33.66 50.93,33.91 50.93,34.67 IC5.6 51.05,34.8 51.05,36.07 51.69,36.7 51.69,43.18 IC5.18 51.82,43.43 51.82,50.04 53.34,51.56 53.34,52.58 JP6.2 | 50.67,33.66 50.8,33.66 IC2.27 50.8,23.88 v50.67,21.46 | 38.35,51.05 38.35,51.31 36.58,53.09 R16.E | 38.35,51.05 R6.2 | v58.04,67.69 58.04,66.55 IC4.8 | JP7.2 44.2,54.61 40.64,51.05 38.35,51.05 | v64.9,62.99 69.72,62.99 IC1.2 69.98,62.99 69.98,60.2 70.36,59.82 C4.1 70.99,59.82 77.22,53.59 C2.+ 77.34,53.47 78.61,52.2 78.61,43.94 83.95,38.61 83.95,38.23 R5.1 | 16.38,52.83 v19.05,52.83
  Bottom 0.305: SV2.10 26.04,17.27 SV1.2 18.67,24.51 5.46,37.72 JP5.3 | 66.86,22.04 v69.22,24.38 | 66.86,22.04 v66.42,21.59 | v70.36,16.38 63.25,16.38 60.96,18.67 60.96,21.46 | 60.96,21.46 61.59,22.1 66.8,22.1 66.86,22.04 | 27.94,52.83 27.94,47.37 JP4.1 | 27.94,52.83 R17.E 31.37,54.61 32.51,55.75 35.56,55.75 R16.E | 58.04,66.93 v58.04,67.69 | 58.04,66.93 52.7,61.59 52.7,58.29 53.34,57.66 53.34,56.64 JP6.2 JP7.2 | v64.9,62.99 62.1,62.99 58.17,66.93 58.04,66.93 | v50.67,21.46 60.96,21.46 | v19.05,52.83 27.94,52.83

## Text on the board
tPlace: A+ | A- | B+ | B- | C+ | C- | RS485 | NOT ETHERNET | POWER | RS485 | THERMOCOUPLE/ | 0v | THERMISTOR | +12v | 12V POWER | W | A7 | A6 | A0 | - | G | + | + | - | - | TEMPERATURE | + | + | make.rrrf.org/ec-2.3 | Design: Zach & Adrian | I2C | BLK | GND | BRN | CTS# | H BRIDGE | RED | c RRRF.org 2009 | VCC | ORG | ICSP | TXD | MICROSTEP | YEL | Extruder Controller | RXD | GRN | RTS# | V2.3 | Serial - USB<>TTL | License: GPL v3.0 | STEPPER | CURRENT | GND BRIDGE | RESET | QUADRATURE
tNames: A1